# Altium PCB Capteur.PcbDoc
Units mil, origin at the board's own origin, x right, y up, seen from the top; angles counter-clockwise.
Board outline 5314.96 x 2362.2 mil, 2 copper layers (Top Layer, Bottom Layer); 23 components, 16 nets, 75 pads, 1 vias.
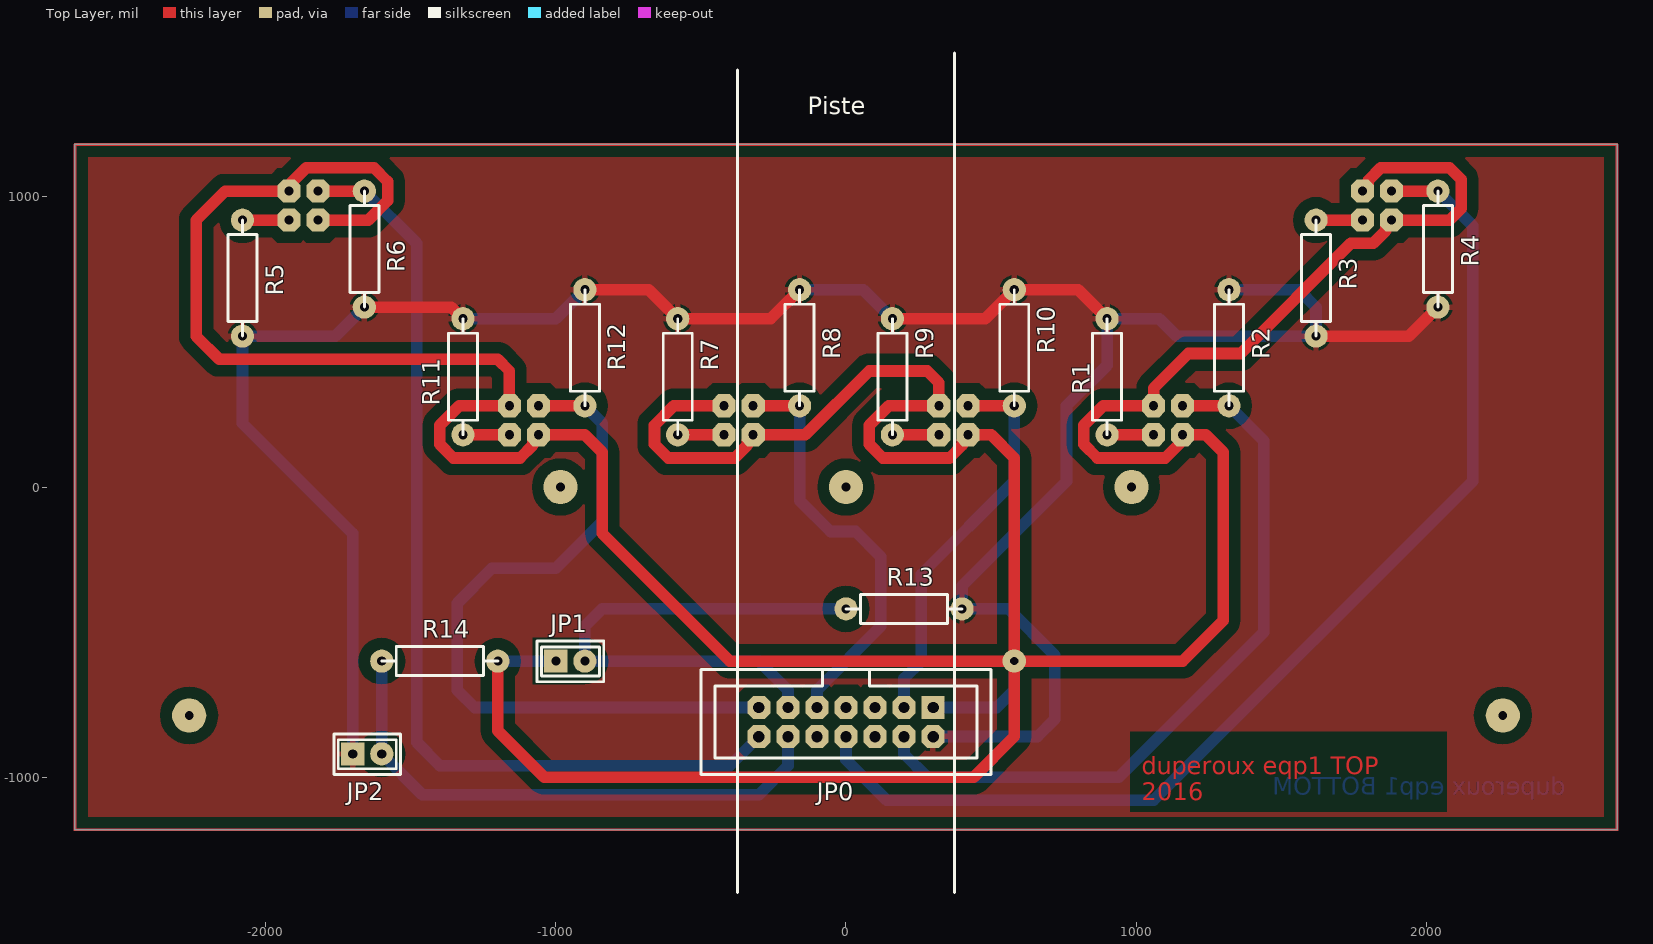
[diagram p0: Top Layer view]
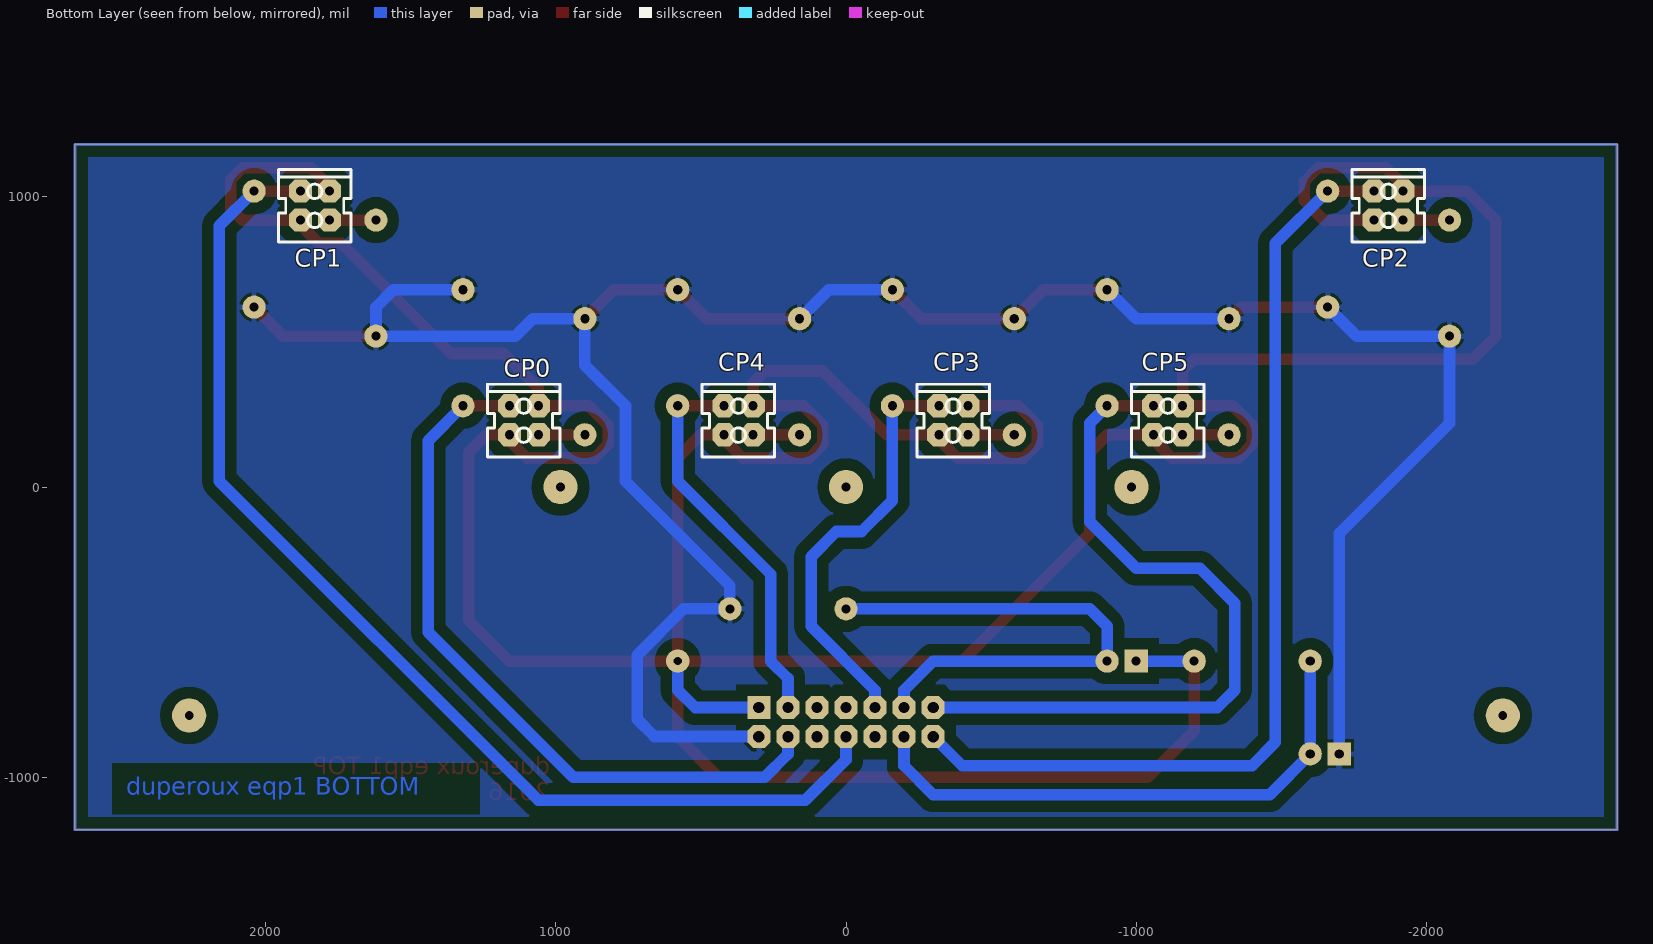
[diagram p1: Bottom Layer view, seen from below]
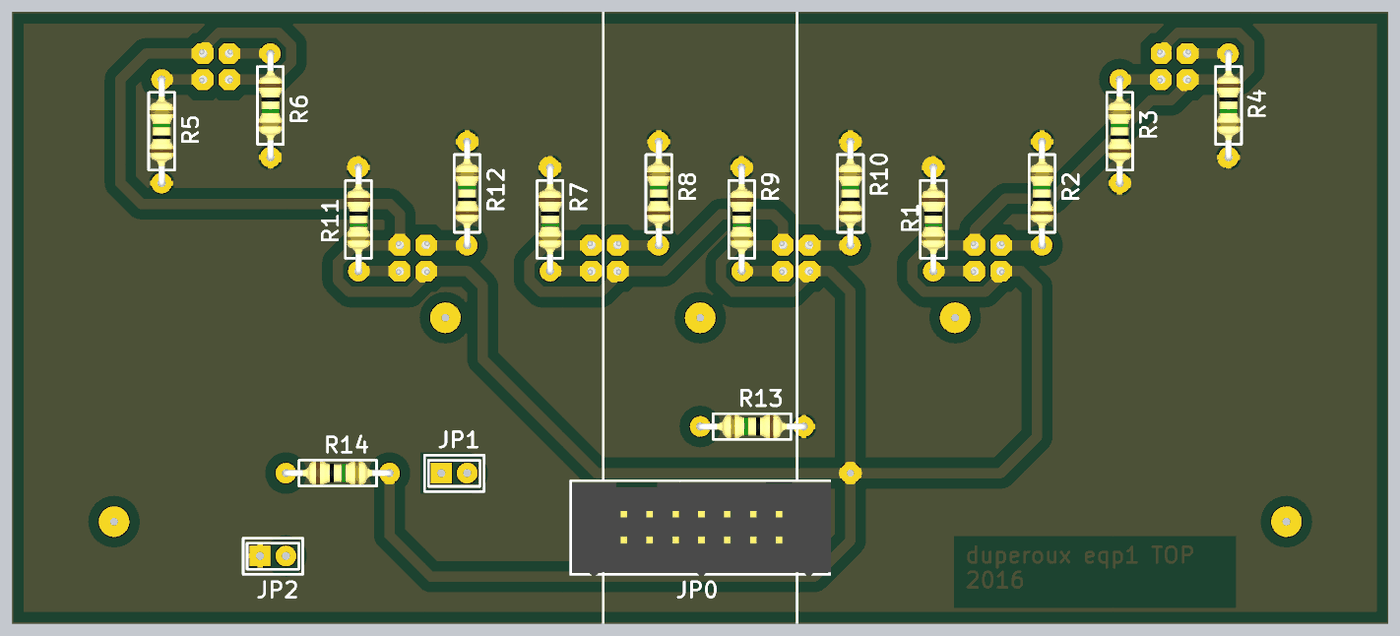
[diagram p2: 3D render of the assembled board from above, using the file's embedded part models]
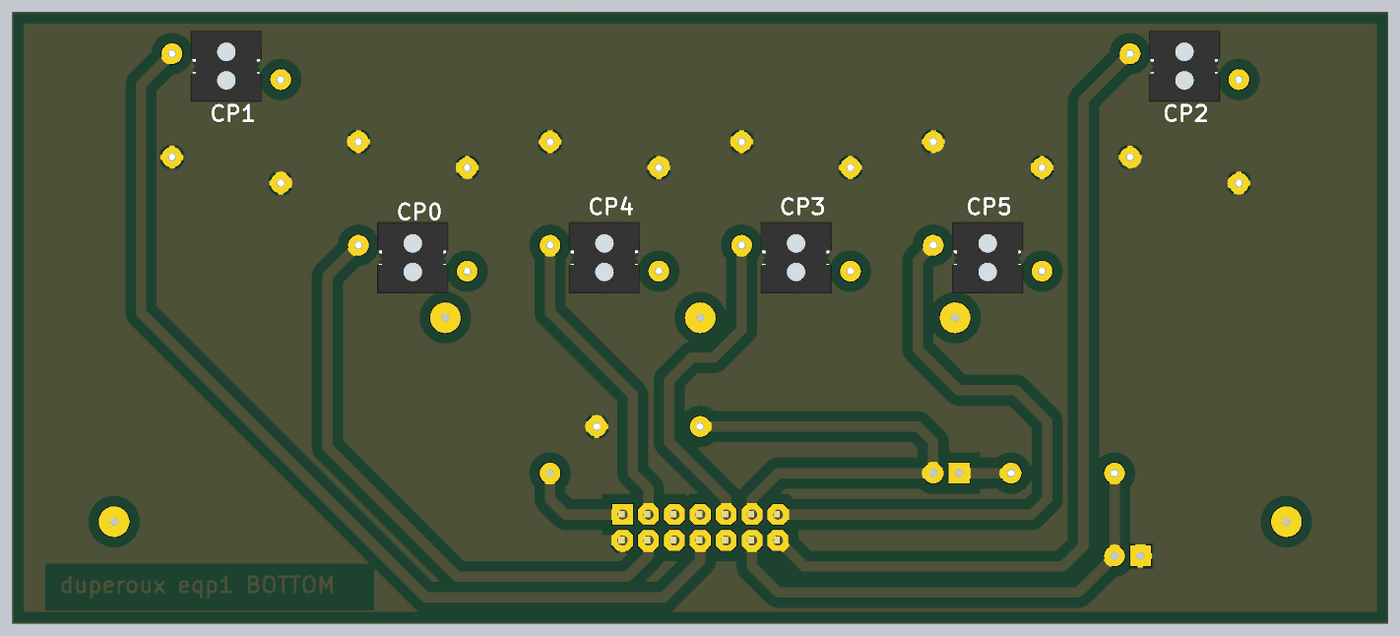
[diagram p3: 3D render of the assembled board from below, using the file's embedded part models]

## Layer stack, top to bottom
Top Solder: solder mask 0.4, Solder Resist, Dk 3.5
Top Layer: signal copper 1.4
Dielectric1: dielectric 12.6, FR-4, Dk 4.8
Bottom Layer: signal copper 1.4
Bottom Solder: solder mask 0.4, Solder Resist, Dk 3.5

## Board outline
-2657.48,-1181.1 2657.48,-1181.1 2657.48,1181.1 -2657.48,1181.1

## Design rules (kind name [scope] priority, off if disabled: settings)
AcuteAngle [All] p1: minimum=9.00000000000000E+0001 checktracksonly=FALSE
AssemblyTestPointUsage [All] p1 off:
AssemblyTestpoint [All] p1 off: testpointundercomponent=TRUE minsize=40 maxsize=100 preferedsize=60 minholesize=0 maxholesize=40 preferedholesize=32 testpointgrid=1 usegrid=TRUE gridtolerance=0.01 allowsidetop=TRUE allowsidebottom=TRUE
Clearance Clearance_plan [InPolygon] p1: gap=40
Clearance [All] p2: gap=20
ComponentClearance [All] p1: gap=20 collisioncheckmode=3 verticalgap=10 showdistances=FALSE
ComponentOrientations [All] p1: allowedrotations=27
DiffPairsRouting [All] p1 off: maxlimit=10 minlimit=10 mostfreqgap=10 toplayer_minwidth=15 toplayer_maxwidth=15 toplayer_prefwidth=15 bottomlayer_minwidth=15 bottomlayer_maxwidth=15 bottomlayer_prefwidth=15 maxuncoupledlength=500
FabricationTestPointUsage TestPointUsage [All] p1 off: valid=0 allowmultiple=FALSE
FabricationTestpoint Testpoint [All] p1 off: side=3 testpointundercomponent=TRUE minsize=40 maxsize=100 preferedsize=60 minholesize=0 maxholesize=40 preferedholesize=32 testpointgrid=1 allowsidetop=TRUE allowsidebottom=TRUE usegrid=TRUE gridtolerance=0.01
FanoutControl Fanout_BGA [IsBGA] p1 off: bgadir=Out bgaviamode=Centered fanoutstyle=Auto fanoutdirection=Alternating viagrid=1 // Fanout_BGA (Default Rule)
FanoutControl Fanout_LCC [IsLCC] p2 off: bgadir=Out bgaviamode=Centered fanoutstyle=Auto fanoutdirection=Alternating viagrid=1 // Fanout_LCC (Default Rule)
FanoutControl Fanout_SOIC [IsSOIC] p3 off: bgadir=Out bgaviamode=Centered fanoutstyle=Auto fanoutdirection=Alternating viagrid=1 // Fanout_SOIC (Default Rule)
FanoutControl Fanout_Small [(CompPinCount < 5)] p4 off: bgadir=Out bgaviamode=Centered fanoutstyle=Auto fanoutdirection=OutThenIn viagrid=1 // Fanout_Small (Default Rule)
FanoutControl Fanout_Default [All] p5 off: bgadir=Out bgaviamode=Centered fanoutstyle=Auto fanoutdirection=Alternating viagrid=1 // Fanout_Default (Default Rule)
Height [All] p1 off: minheight=0 maxheight=1000 prefheight=500
HoleSize [All] p1 off: absolutevalues=TRUE maxlimit=100 minlimit=1 maxpercent=80.000 minpercent=20.000
HoleToHoleClearance [All] p1 off: gap=10 allowstackedmicrovias=TRUE
MinimumAnnularRing [All] p1: minimumring=20
MinimumSolderMaskSliver [All] p1 off: minsoldermaskwidth=10
PermittedLayers [All] p1: toplayerpermitted=TRUE bottomlayerpermitted=TRUE
PlaneClearance [All] p1 off: clearance=20
PlaneConnect [All] p1 off: planeconnectstyle=Relief reliefexpansion=30 reliefentries=4 reliefconductorwidth=20 reliefairgap=20
PolygonConnect [All] p1: connectstyle=Relief reliefconductorwidth=20 reliefentries=4 polygonreliefangle="90 Angle" airgapwidth=10
RoutingCorners [All] p1 off: cornerstyle=45-Degree minsetback=100 maxsetback=100
RoutingPriority [All] p1 off: routingpriority=0
RoutingTopology [All] p1 off: topology=Shortest
RoutingVias [All] p1: holewidth=38 width=80 viastyle="Through Hole" minholewidth=28 minwidth=60 maxholewidth=50 maxwidth=120
SilkToSilkClearance [All] p1 off: silktosilkclearance=10
SilkToSolderMaskClearance SilkscreenOverComponentPads [IsPad] p1 off: minsilkscreentomaskgap=10 clearancetoexposedcopper=TRUE
SolderMaskExpansion [All] p1 off: expansion=4
Width [All] p1: maxlimit=80 minlimit=30 preferedwidth=40
8 further rules are at their usual default settings.

## Components (designator, comment, footprint, x,y, rotation, side; value= is the part's Value field where it differs from the comment)
CP0 "CNY70" CNY70 1160,180 r90 bottom
CP1 "CNY70" CNY70 1880,920 r90 bottom
CP2 "CNY70" CNY70 -1820,920 r90 bottom
CP3 "CNY70" CNY70 -320,180 r90 bottom
CP4 "CNY70" CNY70 420,180 r90 bottom
CP5 "CNY70" CNY70 -1060,180 r90 bottom
JP0 "Connecteur Robot" "HE10 2x7" 300,-760 r270 top
JP1 "Connecteur bipastille" Conn_SIG_2pts -1000,-600 r180 top
JP2 "Connecteur bipastille" Conn_SIG_2pts -1700,-920 r180 top
R1 "103" Axial_4 900,580 r270 top
R2 "33k" Axial_4 1320,280 r90 top
R3 "103" Axial_4 1620,520 r90 top
R4 "33k" Axial_4 2040,1020 r270 top
R5 "103" Axial_4 -2080,520 r90 top
R6 "33k" Axial_4 -1660,1020 r270 top
R7 "103" Axial_4 -580,580 r270 top
R8 "33k" Axial_4 -160,280 r90 top
R9 "103" Axial_4 160,580 r270 top
R10 "33k" Axial_4 580,280 r90 top
R11 "103" Axial_4 -1320,580 r270 top
R12 "33k" Axial_4 -900,280 r90 top
R13 "1K" Axial_4 400,-420 r180 top
R14 "1K" Axial_4 -1600,-600 r0 top

## Footprints (in the part's own frame and the unit in brackets; to place one, negate y for a bottom-side part, rotate by r counter-clockwise, add the part's x,y. Pads: shape width x height; smd on the part's side, far side on the other; paste and mask are expansions set on the pad)
Axial_4 [mil] "Résistance 1/4 ou 1/2 Watt"
  round 80 hole 31.5: 1(0,0) 2(400,0)
  silkscreen extent 0,-50 400,50, body extent -12,-45 412,46, height 116
CNY70 [mil]
  oct 80x80 hole 31.5: 1(0,0) 2(0,-100) 3(100,0) 4(100,-100)
  silkscreen extent -76,-174 174,76, body extent -86,-188 190,88, height 492
Conn_SIG_2pts [mil] "connecteur pour composants déportés faible puissance"
  rect 80x80 hole 31.5: 1(0,0)
  round 80 hole 31.5: 2(-100,0)
  silkscreen extent -165,-69 65,71
"HE10 2x7" [mil] "Connecteur 2 x 7 broches HE10"
  rect 80x80 hole 39.37: 1(0,0)
  oct 80x80 hole 39.37: 2(100,0) 3(0,-100) 4(100,-100) 5(0,-200) 6(100,-200) 7(0,-300) 8(100,-300) 9(0,-400) 10(100,-400) 11(0,-500) 12(100,-500) 13(0,-600) 14(100,-600)
  silkscreen extent -131,-800 231,200, body extent -127,-795 236,205, height 370

## Part data
CP0 CP1 CP2 CP3 CP4 CP5: "Reflective optical sensor"
JP0: library part "HE10 Robot", "Connecteurr pour robot S1"
JP1 JP2: "Double pastilles pour souder un moteur"
R1 R2 R3 R4 R5 R6 R7 R8 R9 R10 R11 R12 R13 R14: library part Res, "Resistance"

## Free pads (board coordinates)
  round 118.11 hole 30 unplated: 1(0,0) 2(984.25,0) 3(-984.25,0) 4(-2263.78,-787.4) 5(2263.78,-787.4)

## Via types
v1: diameter 80, hole 28, Top Layer to Bottom Layer, 1 vias

## Nets (pads, with @x,y where several pads share a name; then routed paths per layer and width w, separated by ;. In a path a pad name is that pad's centre, name@x,y a point inside that pad or via, vN(x,y) a via of type N, cw(c..) or ccw(c..) an arc to the next point about the centre after c; other vN are vias at no path point)
CAPTEUR0: CP0.3 JP0.4 R2.1 | length 2529.9
  Top Layer w40: CP0.3 R2.1
  Bottom Layer w40: JP0.4 200,-920 280,-1000 940,-1000 1440,-500 1440,160 R2.1
CAPTEUR1: CP1.3 JP0.8 R4.1 | length 3963.3
  Top Layer w40: CP1.3 R4.1
  Bottom Layer w40: JP0.8 0,-940 140,-1080 1060,-1080 2160,20 2160,900 R4.1
CAPTEUR2: CP2.3 JP0.14 R6.1 | length 3389.1
  Top Layer w40: CP2.3 R6.1
  Bottom Layer w40: R6.1 -1480,840 -1480,-880 -1400,-960 -400,-960 JP0.14
CAPTEUR3: CP3.3 JP0.9 R8.1 | length 1478
  Top Layer w40: CP3.3 R8.1
  Bottom Layer w40: R8.1@-160,300 R8.1 -160,-46.86 -53.43,-153.43 33.43,-153.43 120,-240 120,-480 -100,-700 JP0.9
CAPTEUR4: CP4.3 JP0.3 R10.1 | length 1377.4
  Top Layer w40: CP4.3 R10.1
  Bottom Layer w40: JP0.3 200,-660 260,-600 260,-300 580,20 R10.1 R10.1@580,300
CAPTEUR5: CP5.3 JP0.13 R12.1 | length 2565.7
  Top Layer w40: CP5.3 R12.1
  Bottom Layer w40: R12.1 -840,220 -840,-120 -1000,-280 -1220,-280 -1340,-400 -1340,-700 -1280,-760 JP0.13
GND: JP0.2 JP2.1 R1.1 R2.2 R3.1 R4.2 R5.1 R6.2 R7.1 R8.2 R9.1 R10.2 R11.1 R12.2 R13.1 | length 8773.3
  Top Layer w40: R6.2 -1360,620 R11.1 ; R12.2 -680,680 R7.1 -260,580 R8.2 ; R9.1 480,580 R10.2 800,680 R1.1 ; R3.1 1940,520 R4.2
  Bottom Layer w40: JP2.1 -1700,-160 -2080,220 R5.1 -1760,520 R6.2 ; R11.1 -1000,580 R12.2 ; R8.2 60,680 R9.1 ; JP0.2 660,-860 720,-800 720,-580 560,-420 R13.1 400,-340 760,20 760,280 900,420 R1.1 1080,580 1140,520 R3.1 1620,620 1560,680 R2.2
NetCP0_2: CP0.2 R1.2 | length 160
  Top Layer w40: R1.2 CP0.2
NetCP1_2: CP1.2 R3.2 | length 160
  Top Layer w40: R3.2 CP1.2
NetCP2_2: CP2.2 R5.2 | length 160
  Top Layer w40: R5.2 CP2.2
NetCP3_2: CP3.2 R7.2 | length 160
  Top Layer w40: R7.2 CP3.2
NetCP4_2: CP4.2 R9.2 | length 160
  Top Layer w40: R9.2 CP4.2
NetCP5_2: CP5.2 R11.2 | length 160
  Top Layer w40: R11.2 CP5.2
NetJP0_11: JP0.11 JP1.2 R13.2 | length 1846.3
  Bottom Layer w40: JP0.11 -200,-700 -300,-600 JP1.2 -900,-480 -840,-420 R13.2
NetJP0_12: JP0.12 JP2.2 R14.1 | length 1919.4
  Bottom Layer w40: R14.1 JP2.2 -1460,-1060 -300,-1060 -200,-960 JP0.12
VCC: CP0.1 CP0.4 CP1.1 CP1.4 CP2.1 CP2.4 CP3.1 CP3.4 CP4.1 CP4.4 CP5.1 CP5.4 JP0.1 JP1.1 R14.2 | length 15962.1
  Top Layer w40: CP2.1 -1646.86,920 -1580,986.86 -1580,1053.14 -1626.86,1100 -1860,1100 -1920,1040 CP2.4 -2140,1020 -2240,920 -2240,520 -2160,440 -1200,440 -1160,400 CP5.4 -1333.14,280 -1400,213.14 -1400,146.86 -1353.14,100 -1123.43,100 -1080,143.43 -1080,160 CP5.1 -900,180 -840,120 -840,-160 -400,-600 v1(580,-600) ; R14.2 -1200,-840 -1040,-1000 440,-1000 580,-860 v1(580,-600) ; CP3.4 -593.14,280 -660,213.14 -660,146.86 -613.14,100 -383.43,100 -340,143.43 -340,160 CP3.1 -140,180 80,400 280,400 320,360 CP4.4 146.86,280 80,213.14 80,146.86 126.86,100 356.57,100 400,143.43 400,160 CP4.1 500,180 580,100 v1(580,-600) ; CP1.4 1800,1040 1800,1056.57 1843.43,1100 2080,1100 2120,1060 2120,960 2080,920 CP1.1 1860,900 1860,883.43 1816.57,840 1740,840 1360,460 1180,460 1060,340 CP0.4 886.86,280 820,213.14 820,146.86 866.86,100 1100,100 1160,160 CP0.1 1240,180 1300,120 1300,-460 1160,-600 v1(580,-600)
  Bottom Layer w40: R14.2 JP1.1 ; JP0.1 520,-760 580,-700 v1(580,-600)
pads on no net: JP0.5 JP0.6 JP0.7 JP0.10

## Polygon pours and split planes (outlines as drawn)
GND on Bottom Layer "Top Layer-No Net" (solid, pour order 12): -2660,-1180 -2658.9,-1181.1 2657.48,-1181.1 2657.48,1181.1 2656.38,1180 -2660,1180
GND on Top Layer "Top Layer-No Net" (solid, pour order 14): -2657.48,1181.1 2657.48,1181.1 2660,1178.58 2660,-1180 -2656.38,-1180 -2657.48,-1181.1

## Other copper
Top Layer:
  text "duperoux eqp1 TOP / 2016" at 1020,-1080 h60
Bottom Layer:
  text "duperoux eqp1 BOTTOM" at 2480,-1060 h60
Multi-Layer:
  the board outline again, w10

## Silkscreen, mask and mechanical layers (free items; w line width, h text height)
Top Overlay:
  lines w10: -374.02,-1397.64 -374.02,1437.01 ; 374.02,-1397.64 374.02,1496.06
  text "Piste" at -131.1,1284.65 h60